# Altium PCB ActiveMarkerDeck.PcbDoc
Units mm, origin at the board's own origin, x right, y up, seen from the top; angles counter-clockwise.
Board outline 64 x 64 mm, 2 copper layers (F.Cu, B.Cu); 22 components, 12 nets, 118 pads, 6 vias.
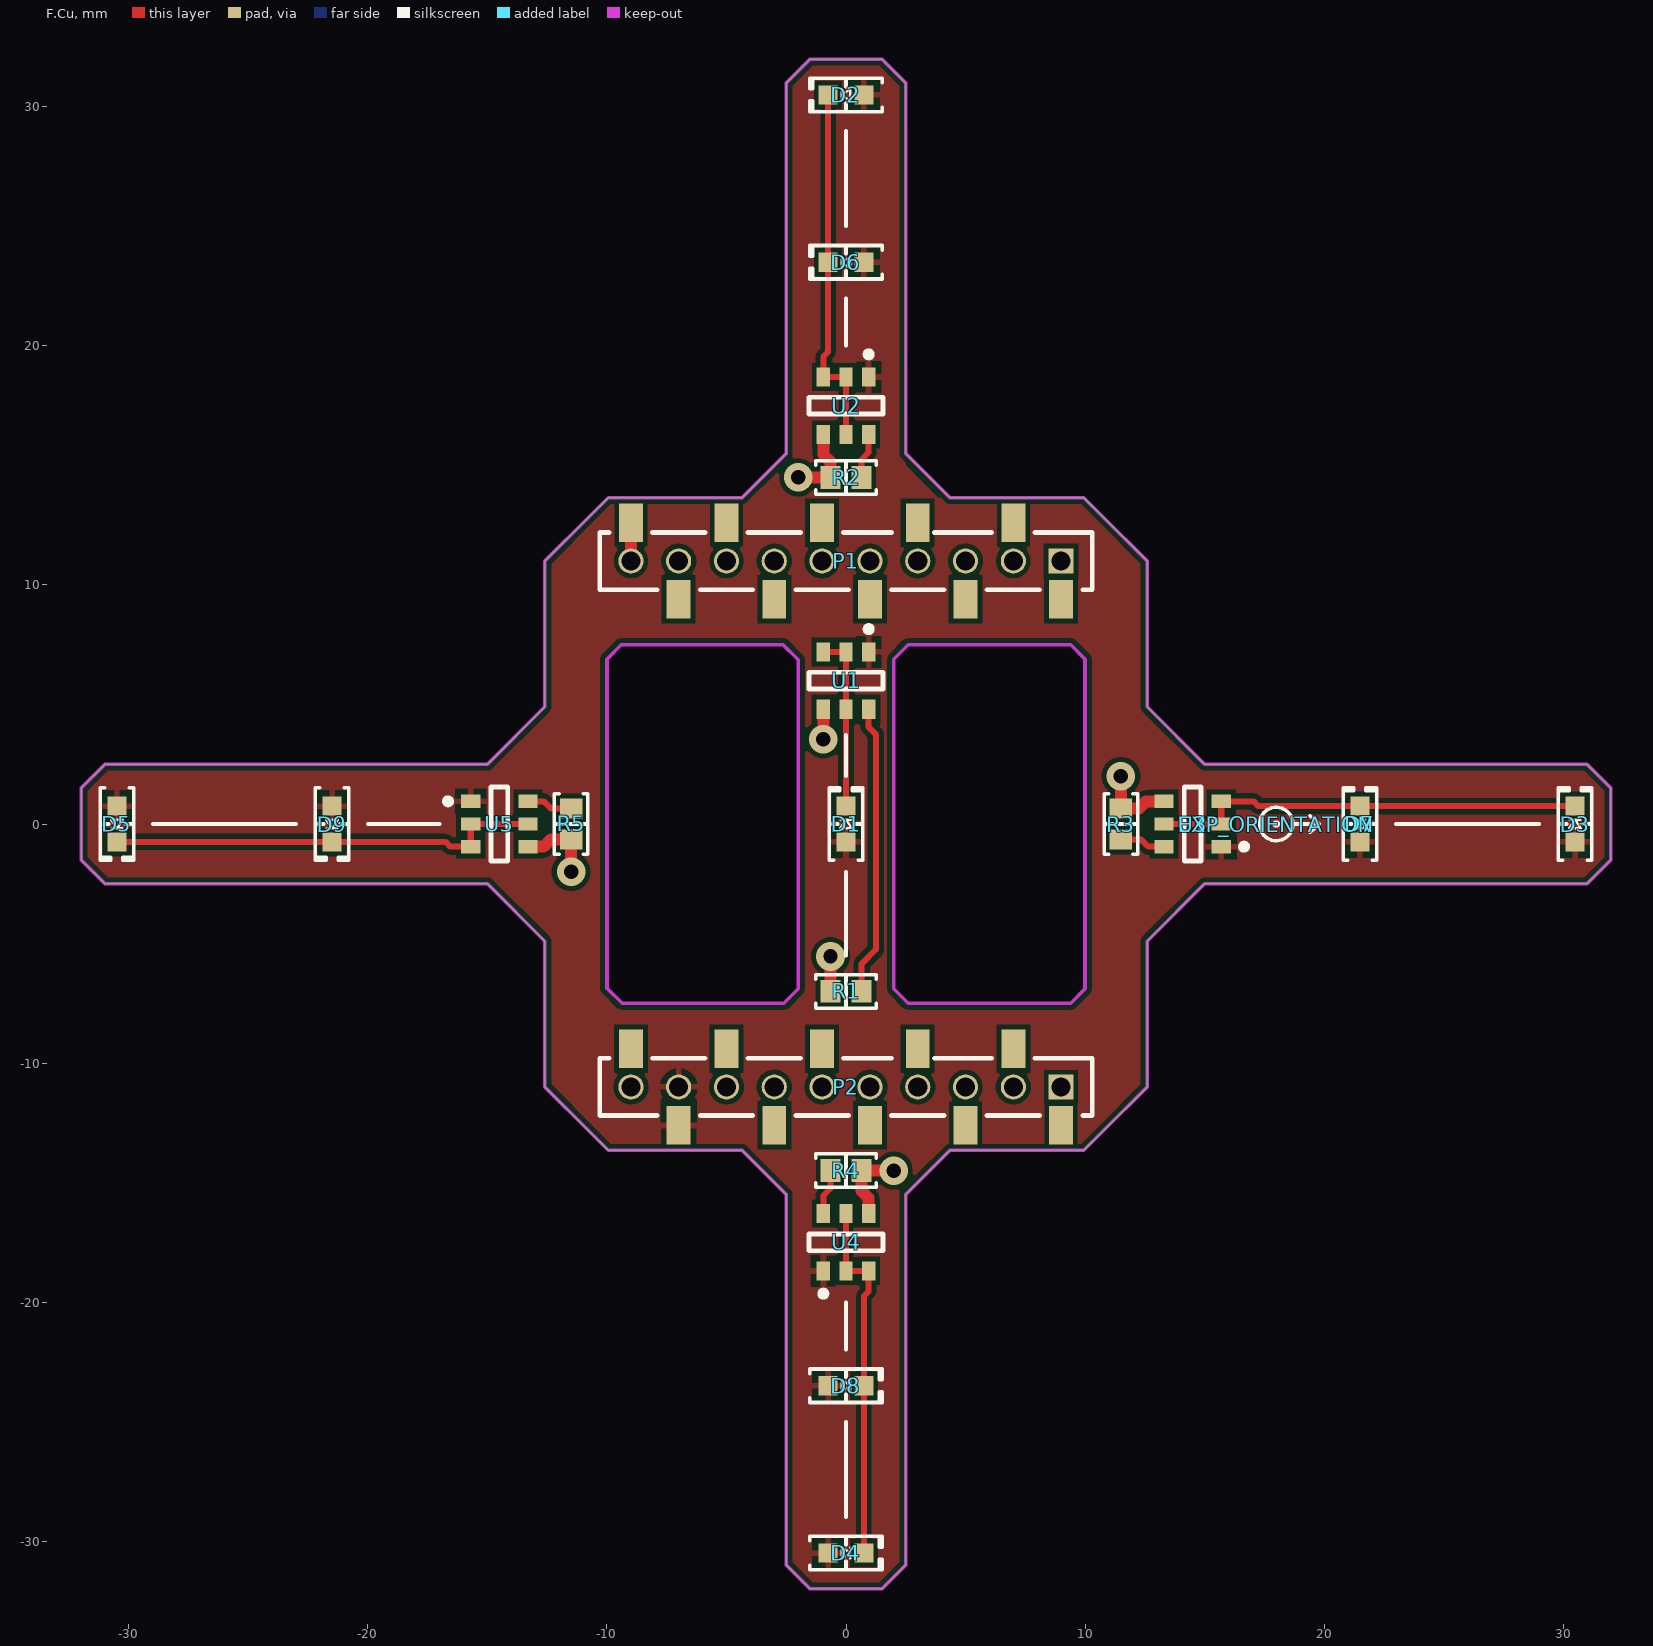
[diagram p0: F.Cu view]
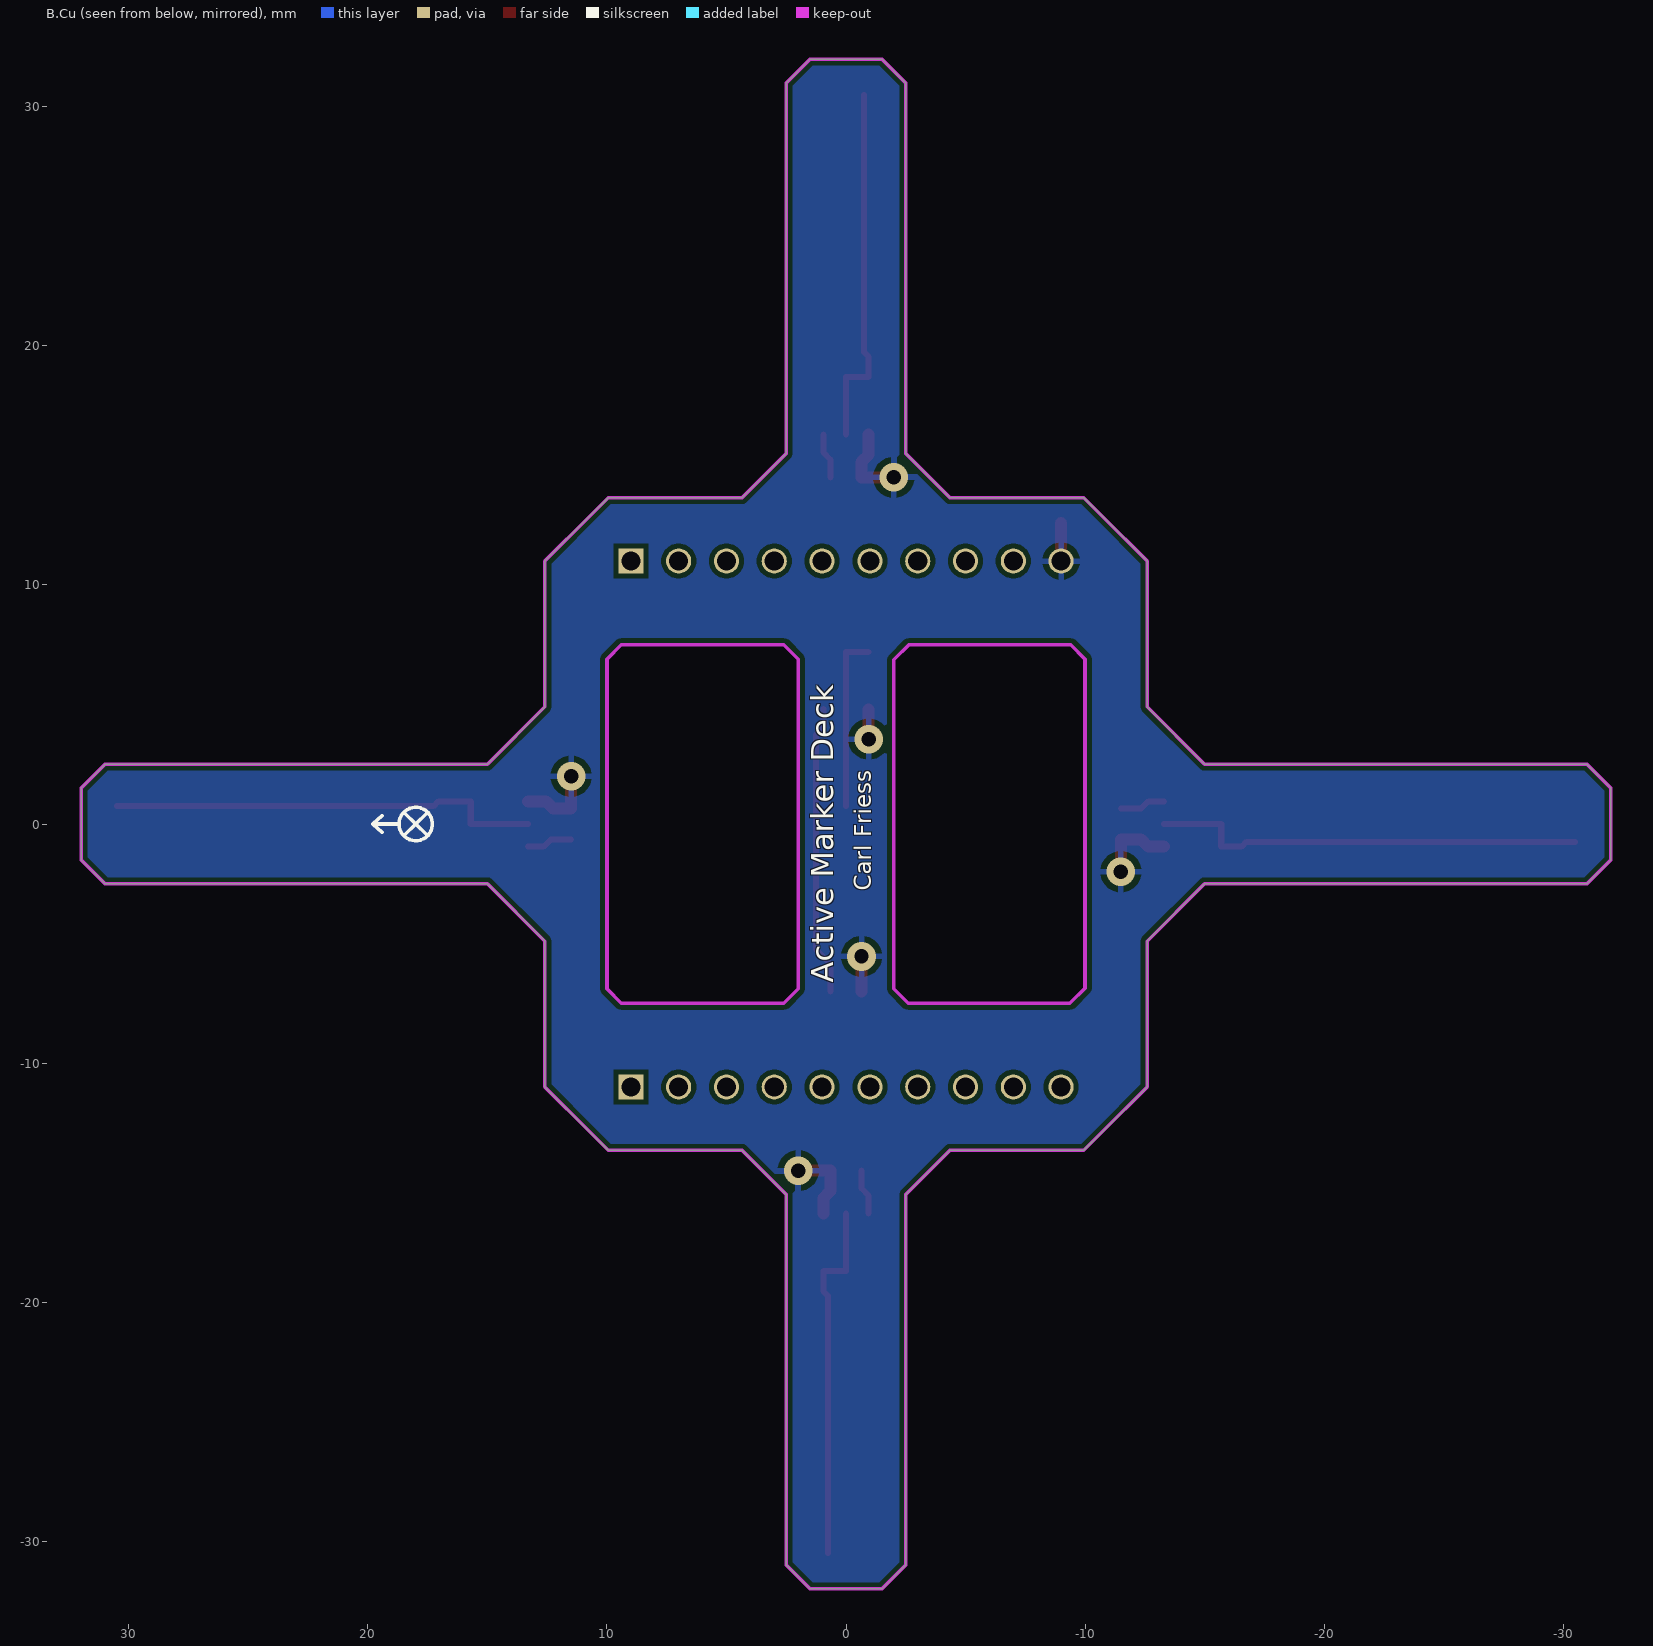
[diagram p1: B.Cu view, seen from below]
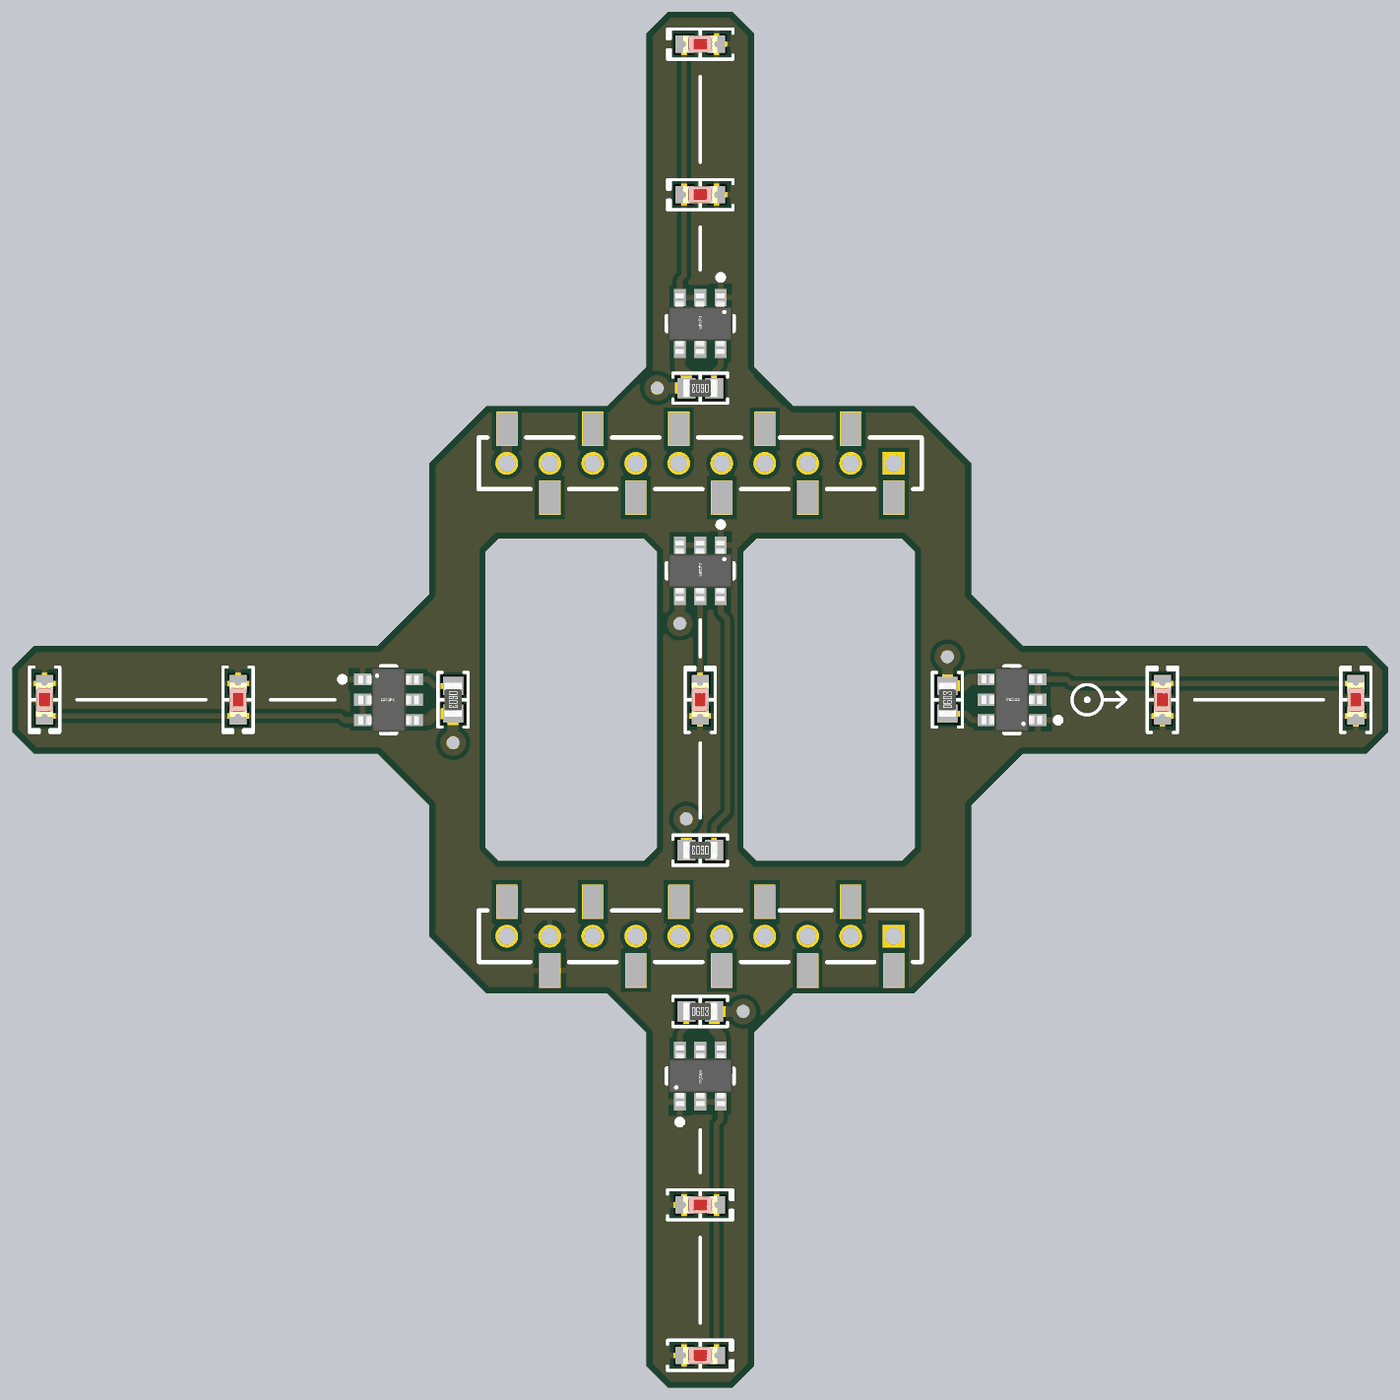
[diagram p2: 3D render of the assembled board from above, using the file's embedded part models]

## Layer stack, top to bottom
F.Mask: solder mask 0.0102, Solder Resist, Dk 3.5
F.Cu: signal copper 0.0356
Dielectric 1: dielectric 0.32, FR-4, Dk 4.8
B.Cu: signal copper 0.0356
B.Mask: solder mask 0.0102, Solder Resist, Dk 3.5

## Board outline
-15,-2.5 -12.6,-4.9 -12.6,-11 -10.7,-12.9 -9.95,-13.65 -4.35,-13.65 -2.5,-15.5 -2.5,-31 -1.5,-32 1.5,-32 2.5,-31 2.5,-15.5 4.35,-13.65 9.95,-13.65 10.7,-12.9 12.6,-11 12.6,-4.9 15,-2.5 31,-2.5 32,-1.5 32,1.5 31,2.5 15,2.5 12.6,4.9 12.6,11 10.7,12.9 9.95,13.65 4.35,13.65 2.5,15.5 2.5,31 1.5,32 -1.5,32 -2.5,31 -2.5,15.5 -4.35,13.65 -9.95,13.65 -10.7,12.9 -12.6,11 -12.6,4.9 -15,2.5 -31,2.5 -32,1.5 -32,-1.5 -31,-2.5
cut-out: 2,6.897 2,-6.897 2.603,-7.5 9.397,-7.5 10,-6.897 10,6.897 9.397,7.5 2.603,7.5
cut-out: -9.397,7.5 -10,6.897 -10,-6.897 -9.397,-7.5 -2.603,-7.5 -2,-6.897 -2,6.897 -2.603,7.5

## Design rules (kind name [scope] priority, off if disabled: settings)
Clearance [InNamedPolygon('GND_L02_P002') or InNamedPolygon('VCOM_L01_P005')] p1: gap=0.2 ignorepadtopadclearanceinfootprint=FALSE
Clearance "Clearence 0.1524_NetClass" [InNetClass('Default')] p2: gap=0.2 ignorepadtopadclearanceinfootprint=FALSE
HoleSize "Hole Size (Default)" [All] p1: absolutevalues=TRUE maxlimit=10 minlimit=0.381 maxpercent=80.000 minpercent=20.000
MinimumSolderMaskSliver [All] p1: minsoldermaskwidth=0
PolygonConnect [All] p1: connectstyle=Relief reliefconductorwidth=0.254 reliefentries=4 polygonreliefangle="90 Angle" airgapwidth=0.254
RoutingVias [All] p1: holewidth=0.6 width=1.2 viastyle="Through Hole" minholewidth=0.6 minwidth=1.2 maxholewidth=0.6 maxwidth=1.2
SilkToSilkClearance [All] p1: silktosilkclearance=0
SilkToSolderMaskClearance [IsPad] p1: minsilkscreentomaskgap=0 clearancetoexposedcopper=TRUE
SolderMaskExpansion [All] p1: expansion=0.102 istentingtop=FALSE
Width [All] p1: maxlimit=0.5 minlimit=0.254 preferedwidth=0.254
26 further rules are at their usual default settings.

## Components (designator, comment, footprint, x,y, rotation, side; value= is the part's Value field where it differs from the comment)
D1 "850nm" "LED 0603_1608 RED" 0,0 r90 top value=Red
D2 "850nm" "LED 0603_1608 RED" 0,30.5 r180 top value=Red
D3 "850nm" "LED 0603_1608 RED" 30.5,0 r90 top value=Red
D4 "850nm" "LED 0603_1608 RED" 0,-30.5 r0 top value=Red
D5 "850nm" "LED 0603_1608 RED" -30.5,0 r270 top value=Red
D6 "850nm" "LED 0603_1608 RED" 0,23.5 r180 top value=Red
D7 "850nm" "LED 0603_1608 RED" 21.5,0 r90 top value=Red
D8 "850nm" "LED 0603_1608 RED" 0,-23.5 r0 top value=Red
D9 "850nm" "LED 0603_1608 RED" -21.5,0 r270 top value=Red
EXP_ORIENTATION "VAL**" EXP_ORIENTATION 18,0 r0 top
P1 "CF_EXP_LEFT" BF090-10-X-B2 0,11 r180 top
P2 "CF_EXP_RIGHT" BF090-10-X-B2 0,-11 r180 top
R1 "20 Ohms" "RES 0603_1608" 0,-7 r180 top
R2 "20 Ohms" "RES 0603_1608" 0,14.5 r180 top
R3 "20 Ohms" "RES 0603_1608" 11.5,0 r90 top
R4 "20 Ohms" "RES 0603_1608" 0,-14.5 r0 top
R5 "20 Ohms" "RES 0603_1608" -11.5,0 r270 top
U1 "BCR421UW6Q-7" FP-SOT26_SC74R-MFG 0,6 r270 top
U2 "BCR421UW6Q-7" FP-SOT26_SC74R-MFG 0,17.5 r270 top
U3 "BCR421UW6Q-7" FP-SOT26_SC74R-MFG 14.5,0 r180 top
U4 "BCR421UW6Q-7" FP-SOT26_SC74R-MFG 0,-17.5 r90 top
U5 "BCR421UW6Q-7" FP-SOT26_SC74R-MFG -14.5,0 r0 top

## Footprints (in the part's own frame and the unit in brackets; to place one, negate y for a bottom-side part, rotate by r counter-clockwise, add the part's x,y. Pads: shape width x height; smd on the part's side, far side on the other; paste and mask are expansions set on the pad)
BF090-10-X-B2 [mm]
  round 1.05 smd paste-1.05 mask-0.05: 1(-9,0) 2(-7,0) 3(-5,0) 4(-3,0) 5(-1,0) 6(1,0) 7(3,0) 8(5,0) 9(7,0) 10(9,0)
  rect 1.05x1.05 hole 0.8 paste-1.05 mask+0: 1(-9,0)
  rect 1x1.6 smd paste-0.03 mask+0: 1(-9,1.6) 2(-7,-1.6) 3(-5,1.6) 4(-3,-1.6) 5(-1,1.6) 6(1,-1.6) 7(3,1.6) 8(5,-1.6) 9(7,1.6) 10(9,-1.6)
  round 1.05 hole 0.8 paste-1.05 mask+0: 2(-7,0) 3(-5,0) 4(-3,0) 5(-1,0) 6(1,0) 7(3,0) 8(5,0) 9(7,0) 10(9,0)
  silkscreen extent -10.3,-1.2 10.3,1.2
EXP_ORIENTATION [mm]
  silkscreen extent -0.7,-0.7 1.8,0.7
FP-SOT26_SC74R-MFG [mm]
  rect 0.8x0.55 smd paste+0 mask+0: 1(-1.2,0.95) 2(-1.2,0) 3(-1.2,-0.95) 4(1.2,-0.95) 5(1.2,0) 6(1.2,0.95)
  silkscreen extent -2.27,-1.55 0.35,1.55, body extent -1.7,-1.65 1.7,1.65, height 0.25
"LED 0603_1608 RED" [mm] "Chip Diode, 2-Leads, Body 1.60x0.80mm, IPC Medium Density"
  rect 0.8x0.8 smd: 1(-0.75,0) 2(0.75,0)
  silkscreen extent -1.52,-0.7 1.52,0.7, body extent -0.8,-0.4 0.8,0.4, height 0.53
"RES 0603_1608" [mm] "Chip Resistor, 2-Leads, Body 1.60x0.80mm, IPC Medium Density"
  rect 0.85x0.95 smd: 1(-0.65,0) 2(0.65,0)
  silkscreen extent -1.27,-0.7 1.27,0.7, body extent -0.8,-0.4 0.8,0.4, height 0.45

## Part data
D1 D2 D3 D4 D5 D6 D7 D8 D9: library part CL-196HR-CD-T, "LED RED SMD", Color=Red, Current - Test=20mA, Device Package="0603 (1608 Metric)", Lens Color=0.60mm, Manufacturer=Citizen, Millicandela Rating=23mcd, Supplier Part Number 1=HIR19-21C/L11/TR8, Voltage - Forward (Vf) (Typ)=1.8V, ComponentLink1Description=Datasheet, ComponentLink1URL=http://ce.citizen.co.jp/up_img/product/zzOM8tpTLfGL/CL-196_e.pdf, ComponentLink2Description="DigiKey Link", ComponentLink2URL=https://www.digikey.com/en/products/detail/citizen/CL-196HR-CD-T/6005906, Configuration=Standard, Height (Max)=0.60mm, LastUpdated="30/08/2022 14:34:25", Lens Size="1.60mm x 0.80mm", Lens Style="Rectangle with Flat Top", Lifecycle Status=Active, Minimum Order=1, Mounting Type="Surface Mount", Package / Case="0603 (1608 Metric)", Packaging=TapeAndReel, Part Number=CL-196HR-CD-T, Part Status=Active, PartId=499, Price=0.06, Series=CL-196, Size / Dimension="1.60mm L x 0.80mm W", Supplier 1="Arrow Electronics", Wavelength - Dominant=640nm
EXP_ORIENTATION: library part EXP_ORIENTATION
R1 R2 R3 R4 R5: library part RC0603JR-0720RL, "RES 20 OHM 5% 1/10W 0603", Device Package="0603 (1608 Metric)", Manufacturer=Yageo, Operating Temperature="-55°C ~ 155°C", Power (Watts)="0.1W, 1/10W", Supplier Device Package=0603, Supplier Part Number 1=311-20GRCT-ND, Temperature Coefficient=±100ppm/°C, Tolerance=±5%, ComponentLink1Description=Datasheet, ComponentLink1URL=https://www.yageo.com/upload/media/product/productsearch/datasheet/rchip/PYu-RC_Group_51_RoHS_L_10.pdf, ComponentLink2Description="DigiKey Link", ComponentLink2URL=https://www.digikey.com/en/products/detail/yageo/RC0603JR-0720RL/726739, Composition="Thick Film", Features="Moisture Resistant", Height - Seated (Max)="0.022\" (0.55mm)", LastUpdated="01/09/2022 12:52:35", Lifecycle Status=Active, Minimum Order=1, Number of Terminations=2, Package / Case="0603 (1608 Metric)", Packaging=CutTape, Part Number=RC0603JR-0720RL, Part Status=Active, PartId=17211, Price=0.01, Resistance="20 Ohms", Series=RC_L, Size / Dimension="0.063\" L x 0.031\" W (1.60mm x 0.80mm)", Supplier 1=DigiKey
U1 U2 U3 U4 U5: library part CMP-12753-000005-1, "TRANSISTOR LED DRIVER SOT26 T&R", Manufacturer="Diodes Inc.", Max Junction Temp=+150°C, Max Power Dissipation=912mW, Output Current=10mA, Output Voltage=40V, Package="SOT26 (SC74R)", Temperature="-55°C to +150°C", Temperature Range Low=-55°C, Automotive=Yes, Automotive Grade="Grade 0", Category=IC, ComponentLink2Description=Datasheet, ComponentLink2URL=https://www.diodes.com/assets/Datasheets/BCR420UW6Q_BCR421UW6Q.pdf, Device Class L1="Integrated Circuits (ICs)", Device Class L2="Power Management ICs", Device Class L3="LED Drivers", Digikey Description="TRANSISTOR LED DRIVER SOT26 T&R", Dimming=PWM, Footprint Url=https://www.diodes.com/assets/Package-Files/SOT26-SC74R.pdf, Height=1.4mm, Lead Free=Yes, Manufacturer Part Number=BCR421UW6Q-7, Mouser Description="LED Lighting Drivers 40V Linear LED 1W 10mA 10% 350mA", Number Of Outputs=1, Octopart=https://octopart.com/bcr421uw6q-7-diodes+inc.-67219224, RoHS=TRUE, Standoff Height=0.013mm, Temperature Range High=+150°C

## Via types
v1: diameter 1.2, hole 0.6, F.Cu to B.Cu, tented both sides, 6 vias

## Nets (pads, with @x,y where several pads share a name; then routed paths per layer and width w, separated by ;. In a path a pad name is that pad's centre, name@x,y a point inside that pad or via, vN(x,y) a via of type N, cw(c..) or ccw(c..) an arc to the next point about the centre after c; other vN are vias at no path point)
GND: P1.10 R1.2 R2.2 R3.2 R4.2 R5.2 U1.4 U2.4 U3.4 U4.4 U5.4 | length 17.4
  F.Cu w0.5: U5.4 -12.65,-0.95 -12.35,-0.65 R5.2 v1(-11.5,-2) ; P1.10@-9,11 P1.10@-9,12.6 ; v1(-2,14.5) R2.2 -0.65,15.15 -0.95,15.45 U2.4 ; v1(-0.95,3.55) U1.4 ; R1.2 v1(-0.65,-5.539) ; U4.4 0.95,-15.65 0.65,-15.35 R4.2 v1(2,-14.5) ; v1(11.5,2) R3.2 12.25,0.65 12.55,0.95 U3.4
NetD1_2: D1.2 U1.2 U1.3 U1.5 | length 7.4
  F.Cu w0.254: U1.3 U1.2 U1.5 D1.2
NetD2_2: D2.2 D6.2 U2.2 U2.3 U2.5 | length 15.2
  F.Cu w0.254: D2.2 -0.75,19.75 -0.95,19.55 U2.3 U2.2 U2.5
NetD3_2: D3.2 D7.2 U3.2 U3.3 U3.5 | length 18.2
  F.Cu w0.254: U3.5 U3.2 U3.3 17.05,0.95 17.25,0.75 23.5,0.75 D3.2
NetD4_2: D4.2 D8.2 U4.2 U4.3 U4.5 | length 15.2
  F.Cu w0.254: U4.5 U4.2 U4.3 0.95,-19.55 0.75,-19.75 D4.2
NetD5_2: D5.2 D9.2 U5.2 U5.3 U5.5 | length 18.2
  F.Cu w0.254: D5.2 D9.2 -16.75,-0.75 -16.55,-0.95 U5.3 U5.2 U5.5
NetR1_1: R1.1 U1.6 | length 12.2
  F.Cu w0.254: R1.1 0.65,-5.85 1.25,-5.25 1.25,3.75 0.95,4.05 U1.6
NetR2_1: R2.1 U2.6 | length 1.9
  F.Cu w0.254: R2.1 0.65,15.25 0.95,15.55 U2.6
NetR3_1: R3.1 U3.6 | length 1.9
  F.Cu w0.254: R3.1 12.35,-0.65 12.65,-0.95 U3.6
NetR4_1: R4.1 U4.6 | length 1.9
  F.Cu w0.254: U4.6 -0.95,-15.55 -0.65,-15.25 R4.1
NetR5_1: R5.1 U5.6 | length 1.9
  F.Cu w0.254: U5.6 -12.65,0.95 -12.35,0.65 R5.1
VCOM: D1.1 D2.1 D3.1 D4.1 D5.1 D6.1 D7.1 D8.1 D9.1 P2.9 U1.1 U2.1 U3.1 U4.1 U5.1
pads on no net: P1.1 P1.2 P1.3 P1.4 P1.5 P1.6 P1.7 P1.8 P1.9 P2.1 P2.2 P2.3 P2.4 P2.5 P2.6 P2.7 P2.8 P2.10

## Polygon pours and split planes (outlines as drawn)
GND on B.Cu "GND_L02_P002" (solid, pour order 2): -1.5,32 -2.5,31 -2.5,15.5 -4.35,13.65 -9.95,13.65 -12.6,11 -12.6,4.9 -15,2.5 -31,2.5 -32,1.5 -32,-1.5 -31,-2.5 -15,-2.5 -12.6,-4.9 -12.6,-11 -9.95,-13.65 -4.35,-13.65 -2.5,-15.5 -2.5,-31 -1.5,-32 1.5,-32 2.5,-31 2.5,-15.5 4.35,-13.65 9.95,-13.65 12.6,-11 12.6,-4.9 15,-2.5 31,-2.5 32,-1.5 32,1.5 31,2.5 15,2.5 12.6,4.9 12.6,11 9.95,13.65 4.35,13.65 2.5,15.5 2.5,31 1.5,32
VCOM on F.Cu "VCOM_L01_P005" (solid, pour order 5): -1.5,32 -2.5,31 -2.5,15.5 -4.35,13.65 -9.95,13.65 -12.6,11 -12.6,4.9 -15,2.5 -31,2.5 -32,1.5 -32,-1.5 -31,-2.5 -15,-2.5 -12.6,-4.9 -12.6,-11 -9.95,-13.65 -4.35,-13.65 -2.5,-15.5 -2.5,-31 -1.5,-32 1.5,-32 2.5,-31 2.5,-15.5 4.35,-13.65 9.95,-13.65 12.6,-11 12.6,-4.9 15,-2.5 31,-2.5 32,-1.5 32,1.5 31,2.5 15,2.5 12.6,4.9 12.6,11 9.95,13.65 3.85,13.65 2.5,15 2.5,31 1.5,32

## Keep-outs
Edge.Cuts:
  lines w0.15: -12.6,-11 -12.6,-4.9 -15,-2.5 -31,-2.5 -32,-1.5 -32,1.5 -31,2.5 -15,2.5 -12.6,4.9 -12.6,11 ; -12.6,-11 -10.7,-12.9 ; -12.6,-11 -10.7,-12.9 ; -12.6,11 -10.7,12.9 ; -12.6,11 -10.7,12.9 ; -10.7,-12.9 -9.95,-13.65 ; -10.7,-12.9 -9.95,-13.65 ; -10.7,12.9 -9.95,13.65 ; -10.7,12.9 -9.95,13.65 ; -9.95,-13.65 -4.35,-13.65 -2.5,-15.5 -2.5,-31 -1.5,-32 1.5,-32 ; -9.95,13.65 -4.35,13.65 -2.5,15.5 -2.5,31 -1.5,32 1.5,32 2.5,31 2.5,15.5 4.35,13.65 9.95,13.65 ; 1.5,-32 2.5,-31 2.5,-15.5 4.35,-13.65 9.95,-13.65 ; 1.5,-32 1.5,-32 ; 9.95,-13.65 10.7,-12.9 ; 9.95,-13.65 10.7,-12.9 ; 9.95,13.65 10.7,12.9 ; 9.95,13.65 10.7,12.9 ; 10.7,-12.9 12.6,-11 ; 10.7,-12.9 12.6,-11 ; 10.7,12.9 12.6,11 ; 10.7,12.9 12.6,11 ; 12.6,-11 12.6,-4.9 15,-2.5 31,-2.5 32,-1.5 32,1.5 31,2.5 15,2.5 12.6,4.9 12.6,11 ; -10,-6.866 -10,6.897 -9.397,7.5 -2.634,7.5 -2,6.866 -2,-6.897 -2.603,-7.5 -9.366,-7.5 -10,-6.866 ; 2,-6.897 2,6.897 2.603,7.5 9.397,7.5 10,6.897 10,-6.897 9.397,-7.5 2.603,-7.5 2,-6.897

## Silkscreen, mask and mechanical layers (free items; w line width, h text height)
F.SilkS:
  lines w0.15: -29,0 -23,0 ; -20,0 -17,0 ; 0,-29 0,-25 ; 0,-22 0,-20 ; 0,-5.5 0,-2 ; 0,2 0,3.725 ; 0,20 0,22 ; 0,25 0,29 ; 23,0 29,0
B.SilkS:
  text "Carl Friess" at -1.287,-2.8 h1.2 r270
  text "Active Marker Deck" at 0.216,-6.65 h1.6 r270
Eco1.User:
  drawing of 1840 lines, arcs and shapes, not listed
  text "Crazyflie 2.0" at 22.235,21.695 h1 r45
  text "Bitcraze" at -21.167,21.571 h1 r135
  text "M2" at 13.826,13.491 h0.8 r135
  text "M1" at -13.491,13.196 h0.8 r45
  text "SWD / BOTTOM" at -10.226,2.084 h1 r90
  text "uUSB / TOP" at -19.376,1.84 h1 r90
  text "ANT" at 15.258,-0.179 h1
  text "BAT" at -15.121,-5.507 h1 r90
  text "BTN" at 13.674,-7.328 h1 r105
  text "M4" at -13.172,-13.512 h0.8 r135
  text "M3" at 13.497,-13.825 h0.8 r45
  text "Bitcraze" at 22.833,-22.429 h1 r135
  text "Crazyflie 2.0" at -23.765,-24.305 h1 r45